# Altium PCB DAC.PcbDoc
Units mm, origin at the board's own origin, x right, y up, seen from the top; angles counter-clockwise.
Board outline 118.62 x 63.75 mm, 2 copper layers (Top Layer, Bottom Layer); 57 components, 54 nets, 213 pads, 27 vias.
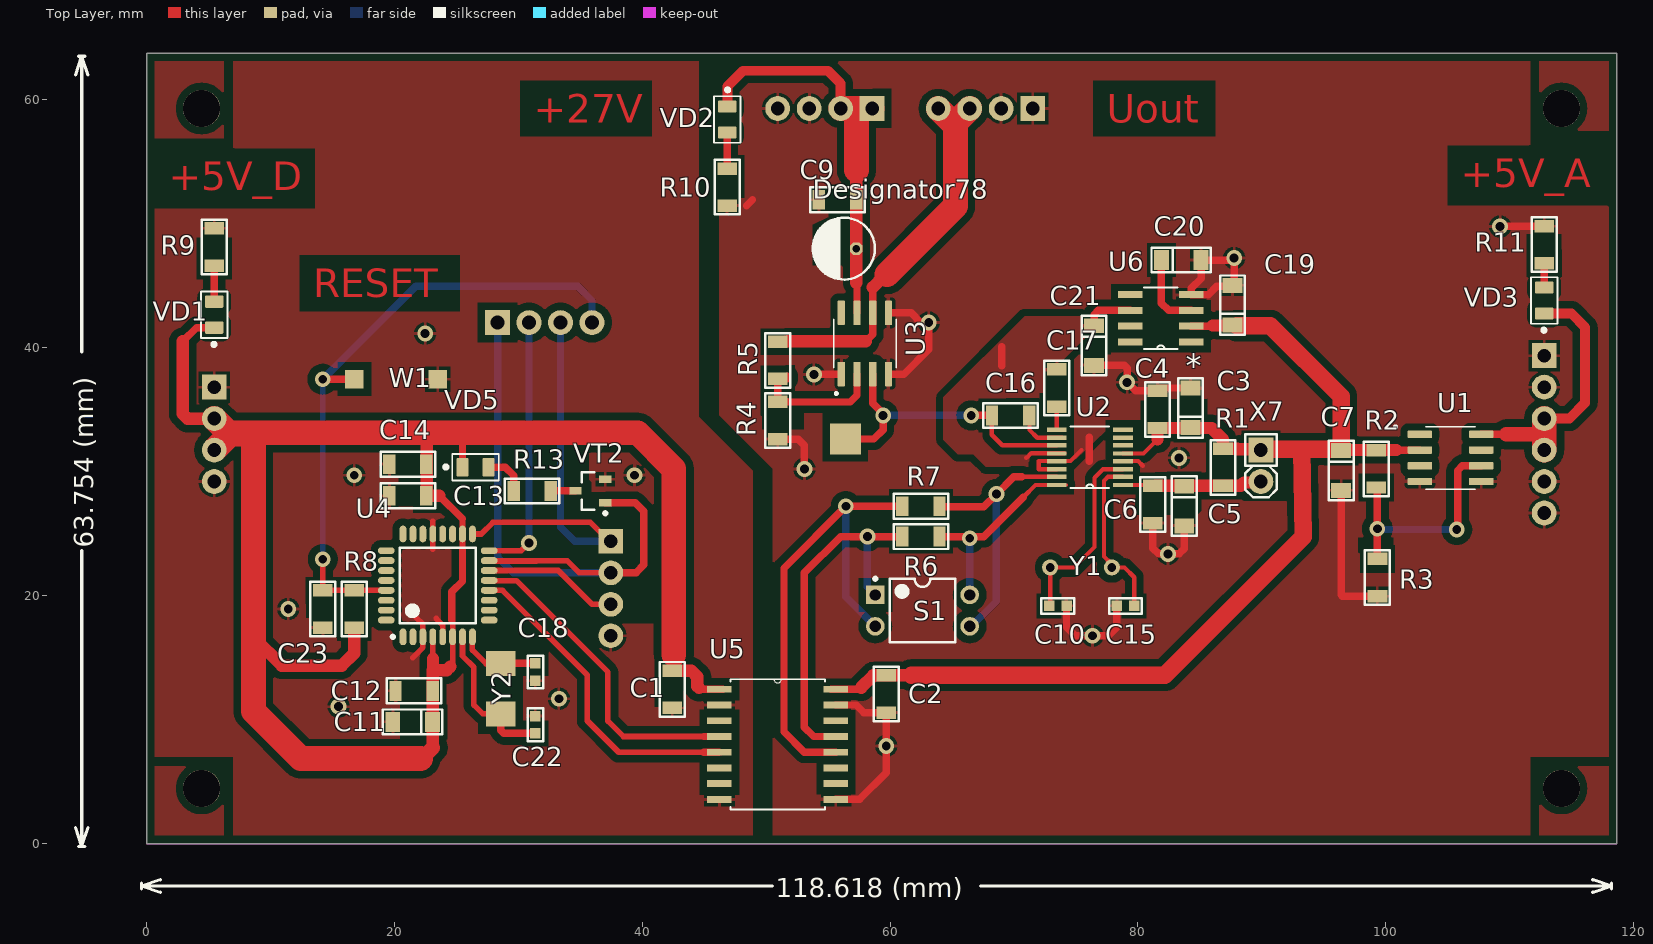
[diagram p0: Top Layer view]
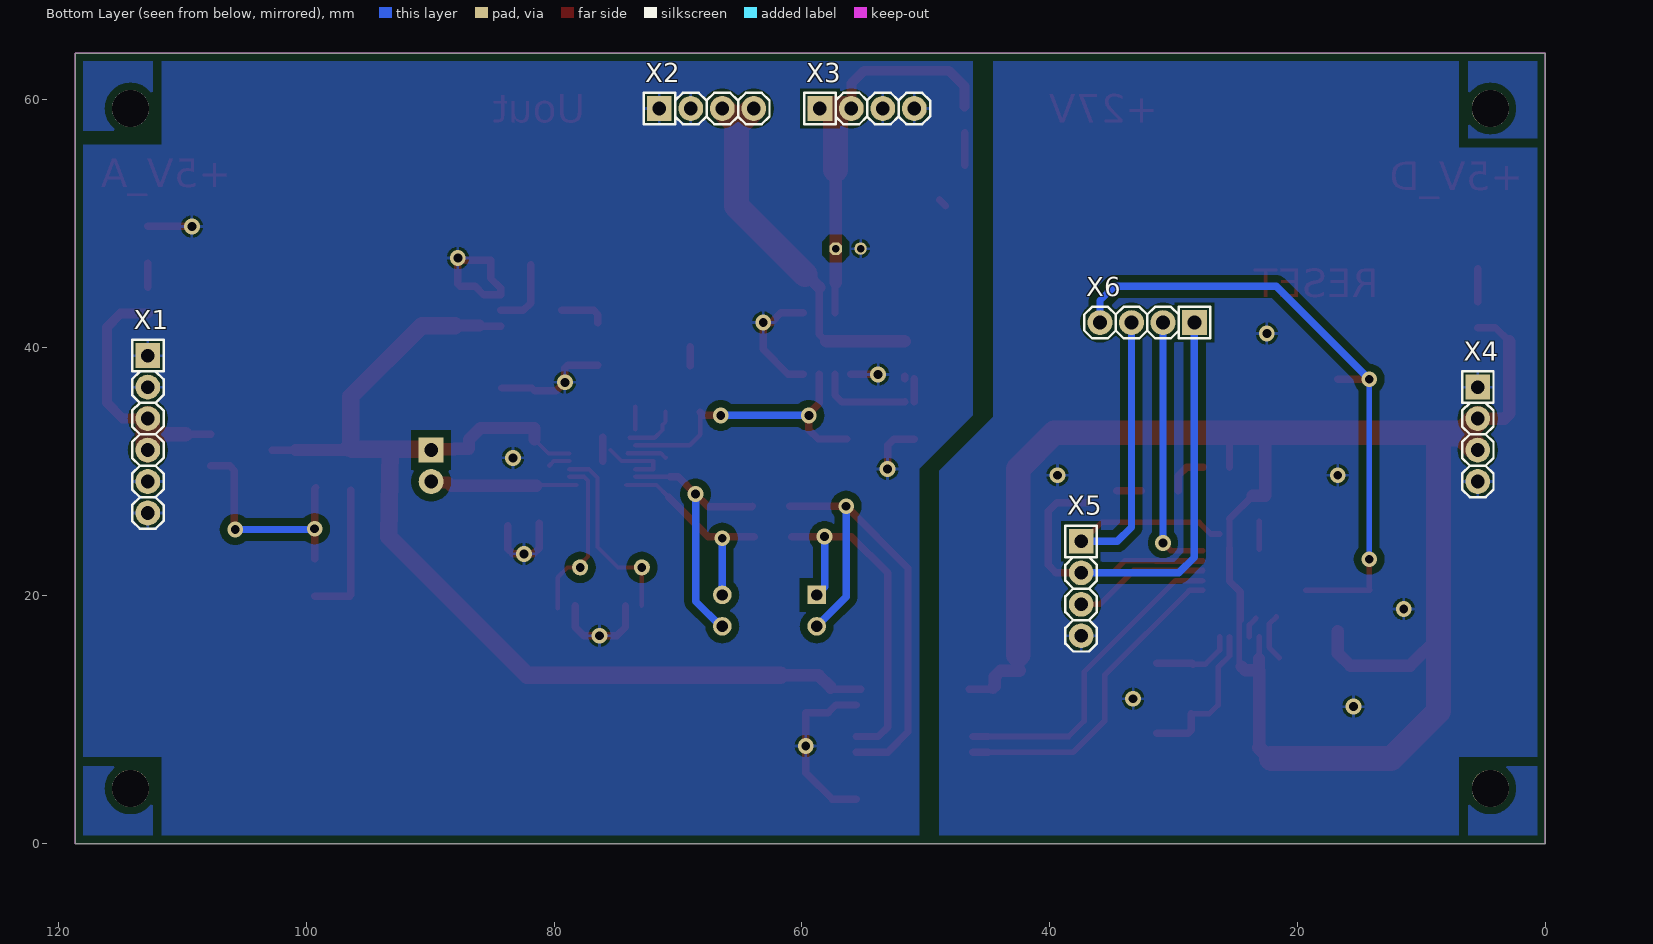
[diagram p1: Bottom Layer view, seen from below]
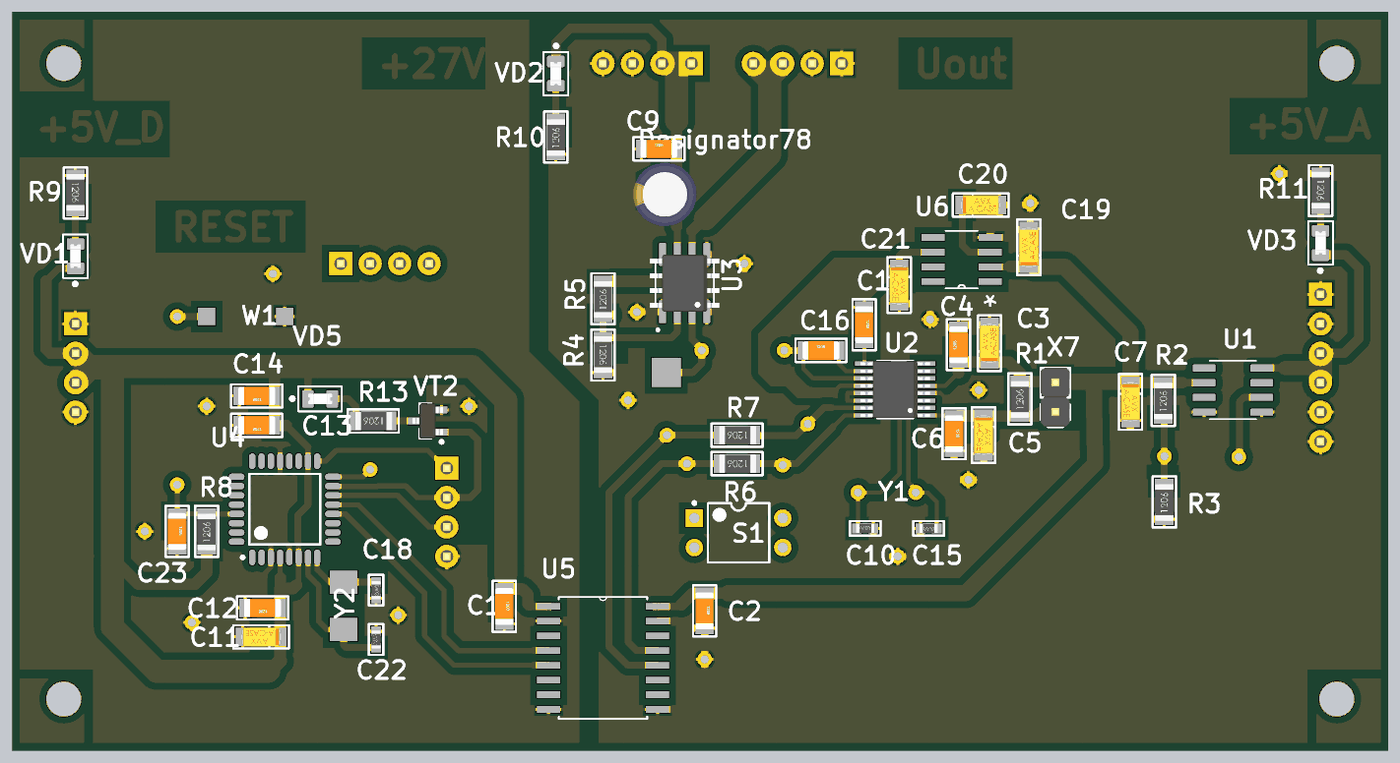
[diagram p2: 3D render of the assembled board from above, using the file's embedded part models]
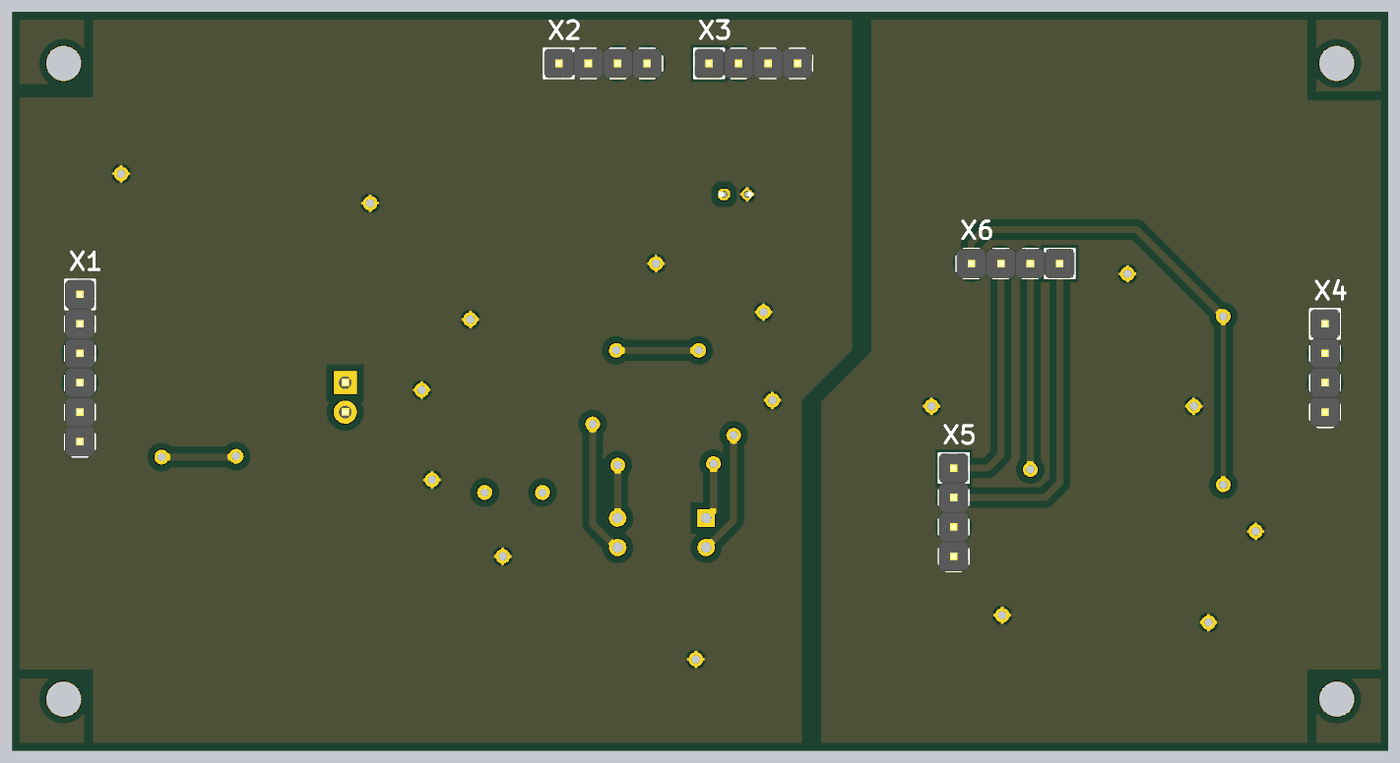
[diagram p3: 3D render of the assembled board from below, using the file's embedded part models]

## Layer stack, top to bottom
Top Solder: solder mask 0.0102, Solder Resist, Dk 3.5
Top Layer: signal copper 0.0356
Dielectric 1: dielectric 0.32, FR-4, Dk 4.8
Bottom Layer: signal copper 0.0356
Bottom Solder: solder mask 0.0102, Solder Resist, Dk 3.5

## Board outline
0,0 0,63.754 118.618,63.754 118.618,0

## Design rules (kind name [scope] priority, off if disabled: settings)
Clearance [All] p1: gap=0.6 ignorepadtopadclearanceinfootprint=TRUE except(0.2: Arc-Arc Arc-Track Arc-SMDPad Arc-THPad Track-Track Track-SMDPad Track-THPad)
PolygonConnect [All] p1: connectstyle=Relief reliefconductorwidth=0.254 reliefentries=4 polygonreliefangle="90 Angle" airgapwidth=0.254
RoutingVias [All] p1: holewidth=0.711 width=1.27 viastyle="Through Hole" minholewidth=0.711 minwidth=1.27 maxholewidth=0.711 maxwidth=1.27
SolderMaskExpansion [All] p1: expansion=0.102
Width [All] p1: maxlimit=10 minlimit=0.3 preferedwidth=0.6
30 further rules are at their usual default settings.

## Classes and differential pairs
component class DAC: C9 C11 C16 C17 C19 C20 C21 C? R1 R2 R3 R4 R5 R6 R7 R8 S1 U1 U2 U3 U4 U5 U6 X5 Y2

## Components (designator, comment, footprint, x,y, rotation, side; value= is the part's Value field where it differs from the comment)
C1 "Ceramic capacitor, 22pF, X7R, ±10%, 50V, 1206, -55...+125°C" "CAP: 1206" 42.418,12.446 r270 top value=22pF (schematic designator C18)
C2 "Ceramic capacitor, 22pF, X7R, ±10%, 50V, 1206, -55...+125°C" "CAP: 1206" 59.69,12.065 r270 top value=22pF (schematic designator C18)
C3 "Tantalum capacitor, 10μF, 16V, ±10%, 2Ohm, case A (3216), -55...+125°C" "CAP: TANTAL-A" 84.239,35.155 r90 top value=10?F (schematic designator C20)
C4 "Ceramic capacitor, 3.3nF, X7R, ±10%, 50V, 1206, -55...+125°C" "CAP: 1206" 81.572,35.028 r90 top value=3.3nF (schematic designator C16)
C5 "Tantalum capacitor, 10μF, 16V, ±10%, 2Ohm, case A (3216), -55...+125°C" "CAP: TANTAL-A" 83.731,27.229 r270 top value=10?F (schematic designator C20)
C6 "Ceramic capacitor, 3.3nF, X7R, ±10%, 50V, 1206, -55...+125°C" "CAP: 1206" 81.191,27.356 r270 top value=3.3nF (schematic designator C16)
C7 "Tantalum capacitor, 10μF, 16V, ±10%, 2Ohm, case A (3216), -55...+125°C" "CAP: TANTAL-A" 96.393,30.099 r270 top value=10?F (schematic designator C20)
C9 "Ceramic capacitor, 0.1μF, X7R, ±10%, 50V, 1206, -55...+125°C" "CAP: 1206" 55.753,51.943 r0 top value=0.1?F
C10 "Comment" "RES: 0603" 73.533,19.177 r0 top
C11 "Tantalum capacitor, 1μF, 16V, ±10%, 2Ohm, case A (3216), -55...+125°C" "CAP: TANTAL-A" 21.463,9.815 r180 top value=1?F
C12 "Ceramic capacitor, 22/12pF, X7R, ±10%, 50V, 1206, -55...+125°C" "CAP: 1206" 21.59,12.319 r180 top value=22/12pF (schematic designator C10)
C13 "Ceramic capacitor, 22/12pF, X7R, ±10%, 50V, 1206, -55...+125°C" "CAP: 1206" 21.082,28.067 r180 top value=22/12pF (schematic designator C10)
C14 "Ceramic capacitor, 22/12pF, X7R, ±10%, 50V, 1206, -55...+125°C" "CAP: 1206" 21.082,30.607 r180 top value=22/12pF (schematic designator C10)
C15 "Comment" "RES: 0603" 78.994,19.177 r180 top
C16 "Ceramic capacitor, 3.3nF, X7R, ±10%, 50V, 1206, -55...+125°C" "CAP: 1206" 69.723,34.544 r0 top value=3.3nF
C17 "Ceramic capacitor, 10nF, X7R, ±10%, 50V, 1206, -55...+125°C" "CAP: 1206" 73.444,36.754 r270 top value=10nF
C18 "Comment" "RES: 0603" 31.369,9.587 r90 top
C19 "Tantalum capacitor, 1μF, 16V, ±10%, 2Ohm, case A (3216), -55...+125°C" "CAP: TANTAL-A" 87.63,43.434 r90 top value=1?F
C20 "Tantalum capacitor, 10μF, 16V, ±10%, 2Ohm, case A (3216), -55...+125°C" "CAP: TANTAL-A" 83.49,47.079 r0 top value=10?F
C21 "Tantalum capacitor, 10μF, 16V, ±10%, 2Ohm, case A (3216), -55...+125°C" "CAP: TANTAL-A" 76.454,40.183 r270 top value=10?F
C22 "Comment" "RES: 0603" 31.369,13.843 r270 top
C23 "Ceramic capacitor, 22pF, X7R, ±10%, 50V, 1206, -55...+125°C" "CAP: 1206" 14.224,18.923 r270 top value=22pF (schematic designator C22)
Designator78 "Comment" "CAP: D5C2H11" 56.261,48.006 r180 top
R1 "Resistor film, 10R, ±5%, 1206, 0.25W, -55...+125°C" "RES: 1206" 86.858,30.356 r90 top value=10R
R2 "Resistor film, 10R, ±5%, 1206, 0.25W, -55...+125°C" "RES: 1206" 99.222,30.226 r90 top value=10R
R3 "Resistor film, 10R, ±5%, 1206, 0.25W, -55...+125°C" "RES: 1206" 99.314,21.463 r90 top value=10R
R4 "Resistor film, 6.34k, ±1%, 1206, 0.25W, -55...+125°C" "RES: 1206" 50.927,34.135 r270 top value=6.34k
R5 "Resistor film, 24k, ±1%, 1206, 0.25W, -55...+125°C" "RES: 1206" 50.927,38.989 r90 top value=24k
R6 "Resistor film, 100R, ±5%, 1206, 0.25W, -55...+125°C" "RES: 1206" 62.484,24.765 r180 top value=100R
R7 "Resistor film, 100R, ±5%, 1206, 0.25W, -55...+125°C" "RES: 1206" 62.484,27.219 r180 top value=100R
R8 "Resistor film, 8.2k, ±5%, 1206, 0.25W, -55...+125°C" "RES: 1206" 16.764,18.923 r90 top value=8.2k
R9 "Resistor film, 10R, ±5%, 1206, 0.25W, -55...+125°C" "RES: 1206" 5.461,48.133 r270 top value=10R (schematic designator R2)
R10 "Resistor film, 10R, ±5%, 1206, 0.25W, -55...+125°C" "RES: 1206" 46.863,52.959 r90 top value=10R (schematic designator R2)
R11 "Resistor film, 10R, ±5%, 1206, 0.25W, -55...+125°C" "RES: 1206" 112.776,48.319 r270 top value=10R (schematic designator R2)
R13 "Resistor film, 10R, ±5%, 1206, 0.25W, -55...+125°C" "RES: 1206" 31.115,28.448 r180 top value=10R (schematic designator R2)
S1 "SW DIP-2" DIP-4 62.611,18.796 r0 top
U1 "ADP3367ARZ" SOIC127P600X175-8N 105.221,31.115 r0 top
U2 "DAC1220E" SOP63P600X175-16N 76.111,31.166 r180 top
U3 "OPA551UA" SOIC127P599X175-8N 57.963,40.348 r90 top
U4 "ATmega8A-AU" 32A_L 23.495,20.828 r90 top
U5 "ADUM1401BRWZ" SOIC127P1032X265-16N 50.927,8.001 r0 top (schematic designator U)
U6 "AD780BRZ" *SOIC127P600X175-8N 81.839,42.38 r180 top (schematic designator U5)
VD1 "Comment" "LED 0805" 5.461,42.672 r90 top
VD2 "Comment" "LED 0805" 46.863,58.42 r270 top
VD3 "Comment" "LED 0805" 112.776,43.815 r90 top
VD5 "Comment" "LED 0805" 26.543,30.353 r0 top
VT2 "Comment" SOT23 35.814,28.448 r180 top
W1 "Comment" RAD-0.2 19.304,37.465 r0 top
X1 "Comment" "CON: PLS-6" 112.776,33.02 r270 bottom
X2 "Comment" "CON: PLS-4" 67.691,59.309 r180 bottom
X3 "Comment" "CON: PLS-4" 54.737,59.309 r180 bottom
X4 "Comment" "CON: PLS-4" 5.461,33.02 r270 bottom
X5 "Comment" "CON: PLS-4" 37.465,20.574 r270 bottom
X6 "Comment" "CON: PLS-4" 32.131,42.037 r0 bottom
X7 "Connector, 2pin, 2.54mm, 500VAC, 3A" "CON: PLS-2" 89.916,30.48 r270 top (schematic designator X3)
Y1 "2.4576MHz" R38#1 74.46,22.276 r90 top
Y2 "8MHz" R38#2 28.575,12.998 r180 top

## Footprints (in the part's own frame and the unit in brackets; to place one, negate y for a bottom-side part, rotate by r counter-clockwise, add the part's x,y. Pads: shape width x height; smd on the part's side, far side on the other; paste and mask are expansions set on the pad)
32A_L [mm] "Thin QFP, 32-Leads, Body 7x7mm, Pitch 0.8mm, IPC High Density"
  oval 1.35x0.55 smd: 1(-4.15,2.8) 2(-4.15,2) 3(-4.15,1.2) 4(-4.15,0.4) 5(-4.15,-0.4) 6(-4.15,-1.2) 7(-4.15,-2) 8(-4.15,-2.8) 17(4.15,-2.8) 18(4.15,-2) 19(4.15,-1.2) 20(4.15,-0.4) 21(4.15,0.4) 22(4.15,1.2) 23(4.15,2) 24(4.15,2.8)
  oval 0.55x1.35 smd: 9(-2.8,-4.15) 10(-2,-4.15) 11(-1.2,-4.15) 12(-0.4,-4.15) 13(0.4,-4.15) 14(1.2,-4.15) 15(2,-4.15) 16(2.8,-4.15) 25(2.8,4.15) 26(2,4.15) 27(1.2,4.15) 28(0.4,4.15) 29(-0.4,4.15) 30(-1.2,4.15) 31(-2,4.15) 32(-2.8,4.15)
  silkscreen extent -4.27,-3.05 3.05,3.75, body extent -3.5,-3.5 3.5,3.5, height 1.2
*SOIC127P600X175-8N [mil]
  rect 78x22 smd: 1(-97,75) 2(-97,25) 3(-97,-25) 4(-97,-75) 5(97,-75) 6(97,-25) 7(97,25) 8(97,75)
  silkscreen extent -54,-98 54,98
"CAP: 1206" [mm]
  rect 1x1.6 smd: 1(-1.5,0) 2(1.5,0)
  silkscreen extent -2.2,-1 2.2,1, body extent -1.6,-0.8 1.6,0.8, height 1
"CAP: D5C2H11" [mm]
  oct 1x1 hole 0.6: 1(-1,0)
  round 1 hole 0.6: 2(1,0)
  silkscreen extent -2.5,-2.5 2.5,2.5, body extent -2.75,-2.75 2.75,2.75, height 13.5
"CAP: TANTAL-A" [mm]
  rect 1.2x1.6 smd: 1(-1.6,0) 2(1.6,0)
  silkscreen extent -2.4,-1 2.4,1, body extent -1.7,-0.84 1.7,0.84, height 1.71
"CON: PLS-2" [mm]
  rect 2x2 hole 1.1: 1(-1.27,0)
  round 2 hole 1.1: 2(1.27,0)
  silkscreen extent -2.54,-1.27 2.54,1.27, body extent -2.57,-1.28 2.51,1.26, height 8.54
"CON: PLS-4" [mm] "PLS-40 4 pin header"
  rect 2x2 hole 1.1: 1(-3.81,0)
  round 2 hole 1.1: 2(-1.27,0) 3(1.27,0) 4(3.81,0)
  silkscreen extent -5.08,-1.27 5.08,1.27, body extent -5.08,-1.27 5.08,1.27, height 8.54
"CON: PLS-6" [mm]
  rect 2x2 hole 1.1: 1(-6.35,0)
  round 2 hole 1.1: 2(-3.81,0) 3(-1.27,0) 4(1.27,0) 5(3.81,0) 6(6.35,0)
  silkscreen extent -7.62,-1.27 7.62,1.27, body extent -7.62,-1.27 7.62,1.27, height 8.54
DIP-4 [mm] "DIP; 4 Leads; Row Spacing 7.62 mm; Pitch 2.54 mm"
  rect 1.5x1.5 hole 0.9: 1(-3.81,1.27)
  round 1.5 hole 0.9: 2(-3.81,-1.27) 3(3.81,-1.27) 4(3.81,1.27)
  silkscreen extent -3.93,-2.55 2.65,2.69, body extent -3.15,-2.5 3.15,2.5, height 5.6
"LED 0805" [mm]
  rrect25% 1x1.5 smd: 1(-1.05,0) 2(1.05,0)
  silkscreen extent -2.61,-1.07 1.88,1.07, body extent -1.03,-0.46 1.03,0.45, height 0.85
R38#1 [mm] "Crystal, Thru-Hole; 2 Leads; Body 3.1 x 8.2 mm (Dia.xH)"
  round 1.3 hole 0.7: 1(0,1.55) 2(0,-3.429)
R38#2 [mm] "Crystal, Thru-Hole; 2 Leads; Body 3.1 x 8.2 mm (Dia.xH)"
  rect 2.4x2 smd: 1(0,2.54) 2(0,-1.524)
RAD-0.2 [mm] "Radial Cap, Thru-Hole; 2 Leads; 0.2 in Pin Spacing"
  rect 1.5x1.5 smd: 1(-2.54,0) 2(4.191,0)
"RES: 0603" [mm]
  rect 0.85x0.85 smd: 1(-0.7,0) 2(0.7,0)
  silkscreen extent -1.33,-0.63 1.33,0.63, body extent -0.8,-0.4 0.8,0.4, height 0.44
"RES: 1206" [mm]
  rect 1x1.6 smd: 1(-1.5,0) 2(1.5,0)
  silkscreen extent -2.2,-1 2.2,1, body extent -1.65,-0.8 1.55,0.8, height 0.47
SOIC127P599X175-8N [mm]
  rrect25% 1.97x0.6 smd: 1(-2.47,1.905) 2(-2.47,0.635) 3(-2.47,-0.635) 4(-2.47,-1.905) 5(2.47,-1.905) 6(2.47,-0.635) 7(2.47,0.635) 8(2.47,1.905)
  silkscreen extent -4.14,-2.52 1.95,2.52, body extent -2.45,-3 2.45,3, height 1.75
SOIC127P600X175-8N [mm]
  rrect25% 1.97x0.6 smd: 1(-2.475,1.905) 2(-2.475,0.635) 3(-2.475,-0.635) 4(-2.475,-1.905) 5(2.475,-1.905) 6(2.475,-0.635) 7(2.475,0.635) 8(2.475,1.905)
  silkscreen extent -4.54,-2.52 2,2.6
SOIC127P1032X265-16N [mil]
  rect 78x22 smd: 1(-185,175) 2(-185,125) 3(-185,75) 4(-185,25) 5(-185,-25) 6(-185,-75) 7(-185,-125) 8(-185,-175) 9(185,-175) 10(185,-125) 11(185,-75) 12(185,-25) 13(185,25) 14(185,75) 15(185,125) 16(185,175)
  silkscreen extent -150,-207 150,207
SOP63P600X175-16N [mil]
  rect 63x14 smd: 1(-105,88) 2(-105,62) 3(-105,38) 4(-105,12) 5(-105,-12) 6(-105,-38) 7(-105,-62) 8(-105,-88) 9(105,-88) 10(105,-62) 11(105,-38) 12(105,-12) 13(105,12) 14(105,38) 15(105,62) 16(105,88)
  silkscreen extent -61,-98 61,98, body extent -118,-97 118,97, height 69
SOT23 [mm]
  rect 1x0.6 smd: 1(-1.2,0.95) 2(-1.2,-0.95) 3(1.2,0)
  round 0.5 on Mech1: ""(-0.9,1.1)
  silkscreen extent -1.33,-1.5 0.7,1.92, body extent -1.32,-1.52 1.32,1.52, height 1.12

## Part data
C1 C2 C4 C6 C12 C13 C14 C16 C17 C23: library part Ceramic_1206, Manufacturer=Yageo, Package=1206, PartNumber=CC1206KRX7R9BB104, Temperature=-55...+125°C, Tolerance=±10%, TypeCapacitor="Ceramic capacitor", TypeDielectric=X7R, Voltage=50V, HelpURL=https://www.digikey.com/product-detail/en/yageo/CC1206KRX7R9BB104/311-1179-1-ND/303089
  C1 C2 C23: ValueManufacturerPartNumber="Ceramic capacitor, 22pF, X7R, ±10%, 50V, 1206, -55...+125°C"
  C4 C6 C16: ValueManufacturerPartNumber="Ceramic capacitor, 3.3nF, X7R, ±10%, 50V, 1206, -55...+125°C"
  C12 C13 C14: ValueManufacturerPartNumber="Ceramic capacitor, 22/12pF, X7R, ±10%, 50V, 1206, -55...+125°C"
  C17: ValueManufacturerPartNumber="Ceramic capacitor, 10nF, X7R, ±10%, 50V, 1206, -55...+125°C"
C3 C5 C7 C20 C21: library part Tantal_A, Manufacturer=AVX, Package="case A (3216)", PartNumber=F930J107KAAAJ6, Temperature=-55...+125°C, Tolerance=±10%, TypeCapacitor="Tantalum capacitor", TypeDielectric=X7R, ValueManufacturerPartNumber="Tantalum capacitor, 10?F, 16V, ±10%, 2Ohm, case A (3216), -55...+125°C", Voltage=16V, HelpURL=https://www.digikey.com/product-detail/en/avx-corporation/F930J107KAAAJ6/478-12404-1-ND/9645231, Impedance=2Ohm
C9: library part Ceramic_1206, Manufacturer=Yageo, Package=1206, PartNumber=CC1206KRX7R9BB104, Temperature=-55...+125°C, Tolerance=±10%, TypeCapacitor="Ceramic capacitor", TypeDielectric=X7R, ValueManufacturerPartNumber="Ceramic capacitor, 0.1?F, X7R, ±10%, 50V, 1206, -55...+125°C", Voltage=50V, HelpURL=https://www.digikey.com/product-detail/en/yageo/CC1206KRX7R9BB104/311-1179-1-ND/303089
C10 C15 C18 C22 X1 X2 X3 X4 X5 X6: library part Ceramic_0603
C11 C19: library part Tantal_A, Manufacturer=AVX, Package="case A (3216)", PartNumber=F930J107KAAAJ6, Temperature=-55...+125°C, Tolerance=±10%, TypeCapacitor="Tantalum capacitor", TypeDielectric=X7R, ValueManufacturerPartNumber="Tantalum capacitor, 1?F, 16V, ±10%, 2Ohm, case A (3216), -55...+125°C", Voltage=16V, HelpURL=https://www.digikey.com/product-detail/en/avx-corporation/F930J107KAAAJ6/478-12404-1-ND/9645231, Impedance=2Ohm
R1 R2 R3 R6 R7 R8 R9 R10 R11 R13: library part Resistor_1206, Manufacturer=Yageo, Package=1206, PartNumber=RC1206JR-07100RL, Power=0.25W, Temperature=-55...+125°C, Tolerance=±5%, TypeResistor="Resistor film", HelpURL=https://www.digikey.com/product-detail/en/yageo/RC1206JR-07100RL/311-100ERCT-ND/732153
  R1 R2 R3 R9 R10 R11 R13: ValueManufacturerPartNumber="Resistor film, 10R, ±5%, 1206, 0.25W, -55...+125°C"
  R6 R7: ValueManufacturerPartNumber="Resistor film, 100R, ±5%, 1206, 0.25W, -55...+125°C"
  R8: ValueManufacturerPartNumber="Resistor film, 8.2k, ±5%, 1206, 0.25W, -55...+125°C"
R4 R5: library part Resistor_1206, Manufacturer=Yageo, Package=1206, PartNumber=RC1206JR-07100RL, Power=0.25W, Temperature=-55...+125°C, Tolerance=±1%, TypeResistor="Resistor film", HelpURL=https://www.digikey.com/product-detail/en/yageo/RC1206JR-07100RL/311-100ERCT-ND/732153
  R4: ValueManufacturerPartNumber="Resistor film, 6.34k, ±1%, 1206, 0.25W, -55...+125°C"
  R5: ValueManufacturerPartNumber="Resistor film, 24k, ±1%, 1206, 0.25W, -55...+125°C"
S1: "DIP Switch, 2 Position, SPST", LatestRevisionDate=17-Jul-2002, LatestRevisionNote="Re-released for DXP Platform.", PackageReference=DIP-4, Published=24-Mar-1999, Publisher="Altium Limited"
U2: "20-Bit Delta-Sigma Low Power Digital-To-Analog Converter 16-SSOP -40 to 85", Package="SSOP-16 Texas Instruments", Availability=Warning, MF="Texas Instruments", MP=DAC1220E, Price=None, Purchase-URL=https://pricing.snapeda.com/search/part/DAC1220E/?ref=eda, SnapEDA_Link=https://www.snapeda.com/parts/DAC1220E/Texas%20Instruments/view-part/52026/?ref=snap
U3: "High-current (380mA Typ), high-voltage (60V), operational amplifier 8-SOIC -40 to 125", Package="SOIC-8 Texas Instruments", Availability=Unavailable, MF="Texas Instruments", MP=OPA551UA, Price=None, Purchase-URL=https://pricing.snapeda.com/search/part/OPA551UA/?ref=eda, SnapEDA_Link=https://www.snapeda.com/parts/OPA551UA/Texas%20Instruments/view-part/9566/?ref=snap
U4: "8-bit AVR Microcontroller, 8KB Flash, 512 Bytes EEPROM, 1KB SRAM, 32-pin TQFP, Industrial Grade (-40°C to 85°C)", Supplier Part Number 1=ATMEGA8A-AU-ND, Code_JEDEC=MS-026-ABA, ComponentLink1Description="Manufacturer Link", ComponentLink1URL=http://www.atmel.com/products/avr/default.asp?, ComponentLink2Description="ATmega8A Datasheet", ComponentLink2URL=http://www.atmel.com/dyn/resources/prod_documents/doc8159.pdf, ComponentLink3Description="ATmega8A Summary", ComponentLink3URL=http://www.atmel.com/dyn/resources/prod_documents/8159S.pdf, ComponentLink4Description="Atmel.com Home", ComponentLink4URL=http://www.atmel.com, DatasheetVersion="revC, Jul-2009", PackageDescription="32-Lead, 7x7x1.0 mm Body, 0.8mm Lead Pitch, Thin Profile Plastic Quad Flat Package (TQFP)", PackageReference=32A, PackageVersion="revB, Oct-2001", Published=1-Apr-2010, Publisher="Altium Limited", Supplier 1=Digi-Key, Supplier 2=Farnell, Supplier 3=Mouser, Supplier Part Number 2=1748532, Supplier Part Number 3=556-ATMEGA8A-AU
U5: "General Purpose Digital Isolator 2500Vrms 4 Channel 10Mbps 25kV/Aµs CMTI 16-SOIC _0.295, 7.50mm Width_", Package="SOIC WIDE-16 Analog Devices", Availability=Unavailable, MF="Analog Devices", MP=ADUM1401BRWZ, Price=None, SnapEDA_Link=https://www.snapeda.com/parts/ADUM1401BRWZ/Analog%20Devices%20Inc./view-part/1210796/?ref=snap
X7: library part PLS-2, CurrentMax=3A, Manufacturer=Connfly, VoltageMax=500VAC, CommentText="\"Ðàçúåì\"", HelpURL=https://www.chipdip.ru/product/pls-2, Multichannel=2pin, PartNumber=PLS-2, Pitch=2.54mm, TypeConnector=Connector, ValueManufacturerPartNumber="Connector, 2pin, 2.54mm, 500VAC, 3A"
Y1 Y2: library part XTAL, "Crystal Oscillator", LatestRevisionDate=17-Jul-2002, LatestRevisionNote="Re-released for DXP Platform.", PackageDescription="Crystal, Thru-Hole; 2 Leads; Body 3.1 x 8.2 mm (Dia.xH)", PackageReference=R38, Published=8-Jun-2000, Publisher="Altium Limited"
U6: Check_prices=https://www.snapeda.com/parts/AD780BRZ/Analog%20Devices%20Inc./view-part/11742/?ref=eda, SnapEDA_Link=https://www.snapeda.com/parts/AD780BRZ/Analog%20Devices%20Inc./view-part/11742/?ref=snap

## Free pads (board coordinates)
  rect 2.5x2.5 smd: 2(56.388,32.639)
  round 3 hole 3: 3(4.445,4.445) 3(4.445,59.309) 3(114.173,4.445) 3(114.173,59.309)

## Via types
v1: diameter 1.27, hole 0.711, Top Layer to Bottom Layer, 27 vias

## Nets (pads, with @x,y where several pads share a name; then routed paths per layer and width w, separated by ;. In a path a pad name is that pad's centre, name@x,y a point inside that pad or via, vN(x,y) a via of type N, cw(c..) or ccw(c..) an arc to the next point about the centre after c; other vN are vias at no path point)
+5.1V: C2.1 C3.1 C4.1 C7.1 C19.1 R1.2 R2.2 U1.2 U2.5 U5.16 U6.2 X7.1 | length 94.6
  Top Layer w0.35: U2.5 80.44,31.471 81.572,32.602
  Top Layer w0.6: U5.16@55.245,12.446 U5.16 57.658,12.446 ; U6.2 85.979,41.745 ; 87.994,31.856 88.024,31.826 ; 100.838,31.75 U1.2
  Top Layer w1: 57.658,12.573 58.65,13.565 C2.1 61.341,13.589 ; 81.572,32.602 C4.1 85.941,33.528 86.858,32.611 R1.2 87.994,31.856 ; 86.03,41.796 C19.1@87.617,41.796 ; 88.024,31.826 X7.1@90.106,31.826 ; C7.1@96.609,31.915 96.444,31.75 100.838,31.75
  Top Layer w1.4: 61.722,13.589 82.169,13.589 93.345,24.765 93.218,31.826 ; C19.1@88.011,41.783 90.678,41.783 96.393,36.068 96.393,32.131 C7.1@96.609,31.915 ; X7.1@90.106,31.826 93.218,31.826 ; C7.1@96.266,31.826 93.218,31.826
+5V*: C1.1 C11.1 C12.1 C13.1 C14.1 R8.1 U4.4 U4.6 U4.18 U5.1 VD1.1 VD5.1 X4.2 X4.3 | length 161.5
  Top Layer w0.45: 23.095,14.905 U4.4 ; 24.511,14.281 24.695,14.281 U4.6 24.695,18.034 ; 25.495,23.844 U4.18 25.495,26.194
  Top Layer w0.6: 2.921,40.513 4.03,41.622 VD1.1 ; 23.095,14.905 23.114,14.905 ; 23.622,28.067 25.495,26.194 ; 24.638,18.034 24.638,20.32 25.495,21.177 25.495,23.844 ; VD5.1 25.493,33.113 25.527,33.147 ; 44.577,12.573 44.577,12.446 U5.1 U5.1@46.482,12.446
  Top Layer w1: 2.921,40.513 2.921,34.671 3.302,34.29 X4.2 ; 8.636,16.637 10.922,14.351 15.748,14.351 16.764,15.367 R8.1@16.764,17.145 ; 23.095,7.728 23.095,13.989 ; 23.114,14.905 23.114,13.989 24.219,13.989 24.511,14.281 ; 23.622,28.067 22.606,28.067 22.606,32.639 23.114,33.147 23.368,33.401 24.36,33.401 ; C1.1 C1.1@42.545,13.946 ; 42.926,15.113 42.545,14.732 C1.1@42.545,13.946 ; 44.577,12.573 44.45,12.7 44.45,13.45 43.954,13.946 C1.1@42.545,13.946
  Top Layer w1.2: 8.636,16.637 8.636,16.891 ; 22.098,6.858 22.225,6.858 23.095,7.728
  Top Layer w2: X4.2 6.731,33.02 ; X4.3@5.588,31.877 6.731,33.02 ; 8.636,16.637 8.636,10.668 12.446,6.858 22.098,6.858 ; 8.636,16.891 8.636,33.02 6.731,33.02 ; 42.545,15.24 42.545,30.226 39.624,33.147 25.527,33.147 23.114,33.147 6.858,33.147 6.731,33.02
+12V: U1.8 VD3.1 X1.3 X1.4 | length 21.3
  Top Layer w0.6: U1.8 109.728,33.02
  Top Layer w0.8: X1.3 114.808,34.29 116.078,35.56 116.078,41.656 114.969,42.765 VD3.1
  Top Layer w1.2: 109.728,33.02 112.776,33.02
  Top Layer w2: X1.4 112.776,33.02 X1.3
+15V: 
+27V: C9.2 Designator78.1 U3.7 VD2.1 X3.1 X3.2 | length 30.8
  Top Layer w0.6: U3.7 57.328,45.085
  Top Layer w0.8: VD2.1 46.863,61.087 48.133,62.357 54.991,62.357 56.007,61.341 X3.2
  Top Layer w1: 57.277,45.26 57.277,53.467
  Top Layer w2: X3.2 X3.1 ; 57.277,54.356 57.277,58.42
-15V: 
ADUM_EN1: 
ADUM_EN2: 
AGND: C2.2 C3.2 C4.2 C5.2 C6.2 C7.2 C9.1 C10.2 C15.2 C19.2 C20.2 C21.2 Designator78.2 R3.1 R4.2 R10.1 R11.1 U1.4 U1.5 U2.4 U2.13 U2.14 U3.1 U3.4 U3.5 U5.9 U5.15 U6.4 X1.1 X1.2 X1.5 X1.6 X2.1 X2.2 X3.3 X3.4 | length 92
  Top Layer w0.35: U2.14 71.996,30.201 71.996,30.861 U2.13 74.549,30.861 75.438,31.75 ; U2.4 80.01,30.861 80.391,30.48
  Top Layer w0.6: 48.411,51.459 48.895,51.943 ; R4.2 52.582,32.635 53.086,32.131 v1(53.086,30.226) ; v1(53.848,37.846) 53.88,37.878 U3.1 ; U5.9 57.531,3.556 59.69,5.715 v1(59.69,7.874) C2.2 57.888,10.565 57.277,11.176 U5.15 ; U3.4 61.119,37.878 63.119,39.878 v1(63.119,42.037) 62.484,42.037 61.703,42.818 U3.5 ; C10.2 74.233,17.461 74.93,16.764 v1(76.327,16.764) 77.597,16.764 78.294,17.461 C15.2 ; 76.073,30.861 76.073,32.766 ; C21.2 78.892,38.583 79.121,38.354 v1(79.121,37.211) 79.804,36.528 C4.2 81.799,36.755 C3.2 ; C6.2 81.191,23.838 81.661,23.368 v1(82.423,23.368) 83.312,23.368 83.731,23.787 C5.2 ; C7.2 96.393,20.066 96.496,19.963 R3.1 ; v1(109.22,49.784) 109.255,49.819 R11.1 ; U6.4 85.687,44.285 86.36,44.958 87.554,44.958 C19.2 87.757,45.161 v1(87.757,47.244) 87.757,47.498 87.338,47.079 C20.2 85.09,45.593 84.303,44.806 U6.4
  other v1: 83.312,31.115
C1: C17.2 U2.9 | length 1.9
  Top Layer w0.35: U2.9 C17.2
C2: C16.2 U2.10 | length 4.5
  Top Layer w0.35: C16.2@71.007,34.849 71.007,34.022 71.247,33.782 71.247,33.363 71.869,32.741 U2.10 U2.10@73.901,32.741
CS_MCU: U4.14 X5.3 | length 11.5
  Top Layer w0.45: U4.14 33.217,22.028 35.941,19.304 X5.3 X5.3@37.973,19.304
DGND: C1.2 C11.2 C12.2 C13.2 C14.2 C18.2 C22.2 C23.2 R9.1 U4.3 U4.5 U4.21 U5.2 U5.8 VT2.2 W1.2 X4.1 X4.4 X5.4 | length 7.8
  Top Layer w0.45: 21.463,14.986 22.295,15.818 U4.3 22.295,17.71 21.717,18.288 ; 23.095,23.749 U4.21 23.095,26.01 ; 23.368,18.161 23.895,17.634 U4.5
  other v1: 15.494,11.049 33.274,11.684 11.43,18.923 16.764,29.718 39.37,29.718 22.479,41.148
DVDD: C5.1 C6.1 R1.1 U2.1 X7.2 | length 12.1
  Top Layer w0.35: U2.1@78.181,28.931 U2.1 C6.1@81.445,28.931
  Top Layer w0.6: C5.1@83.858,28.856 83.882,28.88 C5.1@83.985,28.983
  Top Layer w1: C6.1@81.445,28.88 C5.1@83.882,28.88 ; C5.1@83.858,28.856 R1.1 88.279,28.856 88.557,29.134 X7.2@89.954,29.134
M0: 
M1: 
M2: 
M3: 
M4: 
M5: 
M6: 
M7: 
MISO: U4.16 X6.2 | length 21.3
  Top Layer w0.45: U4.16 30.232,23.628 v1(30.861,24.257)
  Bottom Layer w0.6: v1(30.861,24.257) X6.2
MOSI: U4.15 VT2.1 X5.2 X6.1 | length 49.5
  Top Layer w0.45: U4.15 27.676,22.797 31.466,22.797 31.497,22.828 33.941,22.828 34.925,21.844 X5.2 X5.2@37.973,21.844
  Top Layer w0.6: VT2.1 39.431,27.498 40.132,26.797 40.132,22.479 39.497,21.844 X5.2@37.973,21.844
  Bottom Layer w0.6: X6.1 28.321,23.114 29.591,21.844 X5.2
NetC16_1: C16.1 pad.2 U2.11 U3.3 | length 24.5
  Top Layer w0.35: C16.1@68.199,34.798 68.199,32.982 69.05,32.131 U2.11
  Top Layer w0.6: pad.2 58.674,32.639 59.436,33.401 v1(59.436,34.544) 59.436,34.671 58.598,35.509 U3.3 ; v1(66.548,34.544) 67.945,34.544 C16.1@68.199,34.798
  Bottom Layer w0.6: v1(59.436,34.544) v1(66.548,34.544)
NetC20_1: C20.1 U6.3 | length 5.8
  Top Layer w0.6: C20.1@81.89,46.698 81.89,43.599 82.474,43.015 U6.3
NetR2_1: R2.1 R3.2 U1.6 | length 19.1
  Top Layer w0.6: R2.1 99.314,28.634 v1(99.314,25.4) R3.2 ; v1(105.727,25.336) 105.791,25.4 105.791,30.096 106.175,30.48 U1.6
  Bottom Layer w0.6: v1(99.314,25.4) 99.377,25.336 v1(105.727,25.336)
NetR4_1: R4.1 R5.1 U3.2 | length 9.7
  Top Layer w0.6: R4.1 R5.1 ; R4.1@51.689,35.635 51.689,35.625 56.796,35.625 57.328,36.157 U3.2 ; R5.1@51.689,37.489 R5.1@51.689,37.705
NetR6_1: R6.1 S1.4 U2.16 | length 16.6
  Top Layer w0.35: 70.739,27.94 71.73,28.931 U2.16 U2.16@74.184,28.931
  Top Layer w0.6: R6.1@63.833,24.765 R6.1 67.564,24.765 70.739,27.94
  Bottom Layer w0.6: S1.4 v1(66.421,24.638)
NetR7_1: R7.1 S1.3 U2.15 | length 22
  Top Layer w0.35: 70.612,29.591 U2.15
  Top Layer w0.6: R7.1 64.025,27.178 67.564,27.178 v1(68.58,28.194) 69.977,29.591 70.612,29.591
  Bottom Layer w0.6: S1.3@66.548,17.526 68.58,19.558 v1(68.58,28.194)
NetVD1_2: R9.2 VD1.2 | length 2.7
  Top Layer w0.6: VD1.2 R9.2@5.461,46.379
NetVD2_2: R10.2 VD2.2 | length 2.7
  Top Layer w0.6: R10.2@46.863,54.713 VD2.2
NetVD3_2: R11.2 VD3.2 | length 2
  Top Layer w0.6: VD3.2 R11.2
NetVD4_2: 
NetVD5_2: R13.2 VD5.2 | length 3.5
  Top Layer w0.6: VD5.2 28.956,30.353 29.615,29.694 R13.2
NetVT1_3: 
NetVT2_3: R13.1 VT2.3 | length 2
  Top Layer w0.6: R13.1 VT2.3
NewNet: 
RESET: C23.1 R8.2 U4.29 W1.1 X6.4 | length 51.8
  Top Layer w0.45: C23.1@14.183,20.447 16.637,20.447 16.656,20.428 U4.29 ; C23.1@14.224,20.49 v1(14.224,22.944)
  Top Layer w0.6: v1(14.224,37.465) W1.1
  Bottom Layer w0.45: v1(14.224,22.944) v1(14.224,37.465)
  Bottom Layer w0.6: v1(14.224,37.465) 21.717,44.958 34.798,44.958 35.941,43.815 X6.4
Rá: 
SCK: U4.17 X5.1 X6.3 | length 33.3
  Top Layer w0.45: U4.17 27.01,24.978 27.94,25.908 35.814,25.908 X5.1@37.465,24.257
  Bottom Layer w0.6: X6.3 33.401,25.527 34.544,24.384 X5.1
SCLK: 
SCLK_IN: U4.13 U5.4 | length 26.1
  Top Layer w0.45: U4.13@27.675,21.209 29.845,21.209 37.23,13.824 37.23,9.887 38.481,8.636 44.958,8.636
  Top Layer w0.6: 44.958,8.636 U5.4
SCLK_OUT: R6.2 S1.1 U5.13 | length 29.2
  Top Layer w0.6: U5.13 53.848,8.636 53.086,9.398 53.086,21.844 56.007,24.765 v1(58.166,24.765) R6.2@60.833,24.765
  Bottom Layer w0.6: v1(58.166,24.765) 58.166,20.701 S1.1
SDIO: 
SDIO_IN: U4.12 U5.5 | length 26.2
  Top Layer w0.45: U4.12 28.721,20.428 35.56,13.589 35.56,9.906 38.1,7.366 44.958,7.366
  Top Layer w0.6: 44.958,7.366 U5.5
SDIO_OUT: R7.2 S1.2 U5.12 | length 40.4
  Top Layer w0.6: U5.12 53.086,7.366 51.435,9.017 51.435,22.225 v1(56.429,27.219) R7.2
  Bottom Layer w0.6: v1(56.429,27.219) 56.429,19.898 S1.2
Uout: R5.2 U3.6 X2.3 X2.4 | length 29.9
  Top Layer w0.6: 58.039,40.513 58.598,41.072 U3.6 58.598,44.882
  Top Layer w1: R5.2@51.689,40.513 58.039,40.513 ; 58.598,44.882 59.436,45.72
  Top Layer w2: 59.753,45.91 65.278,51.435 65.278,58.166 X2.3 ; X2.4 65.024,58.166
Uä: 
VREF: C17.1 C21.1 U2.12 U6.6 | length 8.5
  Top Layer w0.35: 70.993,31.115 71.374,31.496 U2.12@74.041,31.496
  Top Layer w0.6: 68.999,38.532 68.999,40.107 ; C21.1@76.454,42.037 76.454,42.672 76.797,43.015 U6.6
XIN: C10.1 U2.3 Y1.1 | length 15.5
  Top Layer w0.35: C10.1@72.91,19.177 Y1.1 74.841,22.276 76.492,23.927 76.492,29.515 77.178,30.201 U2.3
XOUT: C15.1 U2.2 Y1.2 | length 13.1
  Top Layer w0.35: Y1.2@77.762,22.657 77.254,23.165 77.254,29.261 77.584,29.591 U2.2 ; Y1.2 78.905,22.276 79.691,21.49 C15.1@79.691,18.974
XTAL1: C18.1 U4.7 Y2.1 | length 12.6
  Top Layer w0.45: U4.7 25.495,15.145 26.416,14.224 26.416,11.176 27.134,10.458 Y2.1
  Top Layer w0.6: Y2.1 28.575,9.144 28.832,8.887 C18.1
XTAL2: C22.1 U4.8 Y2.2 | length 6.6
  Top Layer w0.45: U4.8 26.295,15.615 27.432,14.478 Y2.2@28.448,14.478
  Top Layer w0.6: Y2.2@28.448,14.478 28.513,14.543 C22.1
pads on no net: U1.1 U1.3 U1.7 U2.6 U2.7 U2.8 U3.8 U4.1 U4.2 U4.9 U4.10 U4.11 U4.19 U4.20 U4.22 U4.23 U4.24 U4.25 U4.26 U4.27 U4.28 U4.30 U4.31 U4.32 U5.3 U5.6 U5.7 U5.10 U5.11 U5.14 U6.1 U6.5 U6.7 U6.8 VT2.

## Polygon pours and split planes (outlines as drawn)
VREF on Top Layer "Ref_plane" (solid, pour order 0): 74.253,31.293 71.666,31.293 71.158,30.785 71.158,30.404 67.729,30.404 66.713,31.42 65.443,31.42 64.3,32.563 64.3,35.992 70.853,42.545 77.47,42.545 72.695,37.77 72.602,37.77
DGND on Top Layer "DGND_TOP" (solid, pour order 8): 44.577,63.754 44.577,34.417 48.895,30.099 48.895,0 0,0 0,63.754
AGND on Top Layer "DGND_TOP" (solid, pour order 16): 118.618,63.754 46.228,63.754 46.228,34.544 50.546,30.226 50.546,0 118.618,0
AGND on Bottom Layer "AGND_BOT" (solid, pour order 14): 118.618,63.754 118.618,0 50.546,0 50.546,30.226 46.228,34.544 46.228,63.754
DGND on Bottom Layer "DGND_BOT" (solid, pour order 10): 0,63.754 44.577,63.754 44.577,34.417 48.895,30.099 48.895,0 0,0

## Keep-outs
Keep-Out Layer:
  the board outline again, w0.1

## Other copper
Top Layer:
  pour cut-out: 111.633,63.754 111.633,56.769 112.395,56.769 112.395,63.754
  pour cut-out: 118.618,56.388 111.633,56.388 111.633,57.531 118.618,57.531
  pour cut-out: 118.618,6.985 111.633,6.985 111.633,6.223 118.618,6.223
  pour cut-out: 111.633,0 111.633,6.985 112.395,6.985 112.395,0
  pour cut-out: 6.985,0 6.985,6.985 6.223,6.985 6.223,0
  pour cut-out: 0,6.985 6.985,6.985 6.985,6.223 0,6.223
  pour cut-out: 0,56.896 6.985,56.896 6.985,56.134 0,56.134
  pour cut-out: 6.985,63.754 6.985,56.134 6.223,56.134 6.223,63.754
  pour cut-out: 31.496,25.019 31.496,23.495 31.369,23.368 31.496,23.241 34.417,23.241 35.433,22.225 35.687,22.479 36.068,22.479 36.068,25.019 35.814,25.273 32.004,25.273
  pour cut-out: 77.851,40.576 77.851,39.437 75.212,39.437 75.946,40.171 75.946,40.767
  pour cut-out: 74.498,30.693 74.498,30.369 74.844,30.369 74.844,30.749
  pour cut-out: 67.219,35.4 67.183,35.436 67.183,35.941 71.463,35.941 71.539,35.865 71.539,35.42
  pour cut-out: 72.39,37.5 72.39,35.903 72.394,35.899 72.487,35.992 73.19,35.992 73.19,37.262 72.936,37.516
  pour cut-out: 70.396,35.899 68.618,35.899 68.618,34.976 68.618,33.833 68.872,32.563 70.396,32.563 71.605,32.563 70.396,33.54
  pour cut-out: 71.539,35.865 71.539,34.976 71.539,34.021 71.539,33.706 71.666,33.418 72.394,33.418 72.682,33.706 73.19,33.706 73.19,35.484 72.809,35.865
  pour cut-out: 74.844,30.917 77.378,33.274 77.378,32.909 77.378,32.674 74.844,30.14
  pour cut-out: 26.162,21.209 26.416,20.955 26.797,20.955 26.797,17.78 25.273,17.78 25.273,20.066
  pour cut-out: 4.061,47.733 4.064,47.736 4.064,48.895 6.858,48.895 6.861,48.892 6.861,47.733
  pour cut-out: 18.288,19.558 18.288,18.415 18.034,18.161 12.827,18.161 12.827,19.32 12.824,19.323
  pour cut-out: 27.242,12.922 27.242,12.058 30.375,12.058 30.375,12.922
  pour cut-out: 20.447,9.017 20.447,8.382 20.574,8.255 22.098,8.255 22.098,13.335 22.136,13.373 20.701,13.373 20.447,13.335
  pour cut-out: 21.717,31.877 21.717,27.178 20.32,27.178 20.32,31.877
  pour cut-out: 23.495,31.75 23.495,28.956 27.051,25.4 29.083,25.4 29.718,24.765 35.941,24.765 35.941,25.527 36.195,25.781 36.322,25.654 38.862,25.654 38.862,22.86 39.116,22.606 39.37,22.606 39.37,26.416 38.862,26.924 38.735,26.797 36.195,26.797 36.195,27.813 35.914,28.094 35.914,29.148 35.713,29.349 35.713,31.496 30.734,31.75
  pour cut-out: 30.861,21.336 33.274,21.336 35.687,18.923 35.687,18.906 36.687,17.905 36.449,17.667 36.449,15.494 35.687,16.256
  pour cut-out: 28.575,19.304 31.877,16.002 32.512,16.002 32.512,15.525 32.227,15.24 30.099,15.24 30.099,15.367 29.591,15.875 27.051,15.875 27.051,16.891 27.051,17.145 26.797,17.399 27.051,17.653 27.559,17.653 27.559,17.78 28.575,18.796
  pour cut-out: 41.021,12.954 41.021,11.046 43.307,11.046 43.307,12.007 43.307,12.954
  pour cut-out: 41.148,22.098 41.275,21.971 41.275,17.78 38.3,17.78 38.226,17.854 38.227,17.854 38.227,21.209
  pour cut-out: 45.72,53.467 48.263,53.467 48.26,53.464 48.26,52.07 45.72,52.07
  pour cut-out: 56.153,53.217 56.149,53.213 54.991,53.213 54.991,50.546 54.994,50.543 56.176,50.543
  pour cut-out: 55.599,50.827 56.642,49.784 55.753,48.895 56.007,48.641 56.007,46.709 56.107,46.609 53.721,46.609 53.721,49.913
  pour cut-out: 49.655,34.492 49.658,33.401 53.089,33.401 53.089,34.631 53.089,34.724
  pour cut-out: 58.293,34.036 58.293,35.179 58.039,35.433 54.991,35.433 54.483,34.925 54.538,34.87 54.538,34.489
  pour cut-out: 60.071,26.543 60.071,25.273 59.944,25.4 56.007,25.4 56.007,26.035 56.642,26.67 57.404,26.67
  pour cut-out: 62.084,28.619 62.884,28.619 62.884,23.365 62.084,23.365
  pour cut-out: 79.791,27.756 79.756,27.721 79.756,26.483 84.776,26.483 85.131,26.838 85.131,27.694
  pour cut-out: 85.458,30.756 85.458,29.985 85.598,29.845 88.265,29.845 88.519,30.099 88.519,31.115
  pour cut-out: 80.645,43.434 80.645,39.624 80.673,39.596 82.712,39.596 82.712,42.383 82.677,42.418
  pour cut-out: 73.19,37.154 73.19,36.354 74.844,36.354 74.844,37.154
  pour cut-out: 80.172,34.628 80.172,35.779 80.177,35.774 82.626,35.774 82.626,35.901 85.558,35.901 85.598,35.941 85.639,35.9 85.639,34.755
  pour cut-out: 111.376,47.919 111.376,49.146 111.379,49.149 114.173,49.149 114.173,47.922 114.176,47.919
  pour cut-out: 92.075,30.607 91.991,30.523 91.991,27.642 91.992,27.64 91.961,27.609 88.515,27.609 88.365,27.758 88.392,27.785 88.392,27.94
  pour cut-out: 97.787,24.684 97.787,23.498 97.917,23.368 100.584,23.368 100.584,24.654 100.587,24.657
  pour cut-out: 58.674,12.827 58.636,12.789 58.636,11.303 60.728,11.303 60.728,12.517
  text "+27V" at 31.242,58.166 h2.3
  text "Uout" at 77.47,58.166 h2.3
  text "+5V_A" at 106.045,52.959 h2.3
  text "+5V_D" at 1.778,52.705 h2.3
  text "RESET" at 13.462,44.069 h2.3
Bottom Layer:
  pour cut-out: 111.633,63.754 111.633,56.769 112.395,56.769 112.395,63.754
  pour cut-out: 118.618,56.388 111.633,56.388 111.633,57.531 118.618,57.531
  pour cut-out: 118.618,6.985 111.633,6.985 111.633,6.223 118.618,6.223
  pour cut-out: 111.633,0 111.633,6.985 112.395,6.985 112.395,0
  pour cut-out: 6.985,0 6.985,6.985 6.223,6.985 6.223,0
  pour cut-out: 0,6.985 6.985,6.985 6.985,6.223 0,6.223
  pour cut-out: 0,56.896 6.985,56.896 6.985,56.134 0,56.134
  pour cut-out: 6.985,63.754 6.985,56.134 6.223,56.134 6.223,63.754

## Silkscreen, mask and mechanical layers (free items; w line width, h text height)
Top Overlay:
  lines w0.254: -5.74,1.293 -5.232,-0.231 ; -5.74,61.999 -5.232,63.523 ; -5.486,-0.231 -4.978,-0.231 ; -5.486,63.523 -4.978,63.523 ; -5.232,23.622 -5.232,-0.231 ; -5.232,39.67 -5.232,63.523 ; -4.724,1.293 -5.232,-0.231 ; -4.724,61.999 -5.232,63.523 ; -0.404,-3.683 -0.404,-3.175 ; 1.12,-3.937 -0.404,-3.429 ; 1.12,-2.921 -0.404,-3.429 ; 50.5,-3.429 -0.404,-3.429 ; 67.31,-3.429 118.214,-3.429 ; 116.69,-3.937 118.214,-3.429 ; 116.69,-2.921 118.214,-3.429 ; 118.214,-3.683 118.214,-3.175
  text "63.754 (mm)" at -4.318,23.876 h1.52 r90
  text "118.618 (mm)" at 50.754,-4.343 h1.52

## Text inside footprints (layer, text, board x,y; h text height)
U5: Mechanical 13 "*" at 45.413,12.88 h1.27
U6: Top Overlay "*" at 85.141,40.293 h1.88 r180; Mechanical 4 "*" at 85.141,40.293 h1.88 r180; Mechanical 4 "*" at 85.141,40.293 h1.88 r180